# Altium PCB Lower.PcbDoc (part 2 of 2)
Units mil, origin at the board's own origin, x right, y up, seen from the top; angles counter-clockwise.
Board outline 3366.33 x 5314.96 mil, 2 copper layers (Top Layer, Bottom Layer); 108 components, 117 nets, 408 pads, 111 vias.
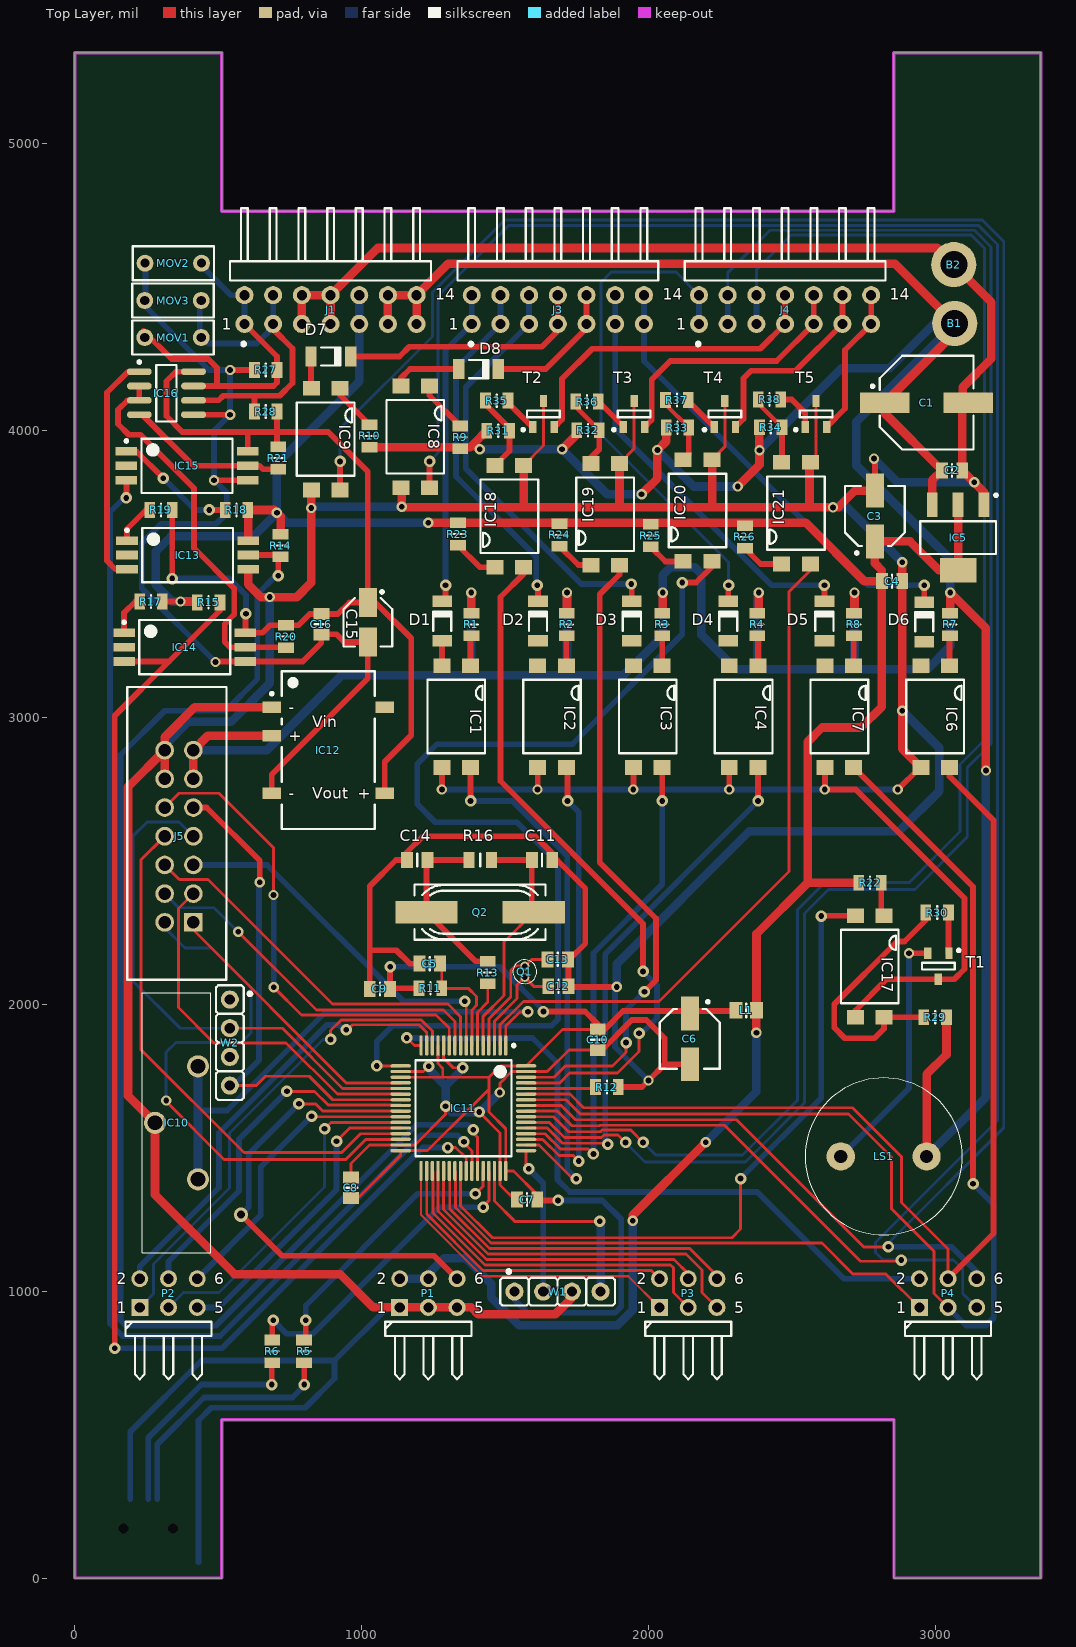
[diagram p0: Top Layer view]

## Via types
v1: diameter 40, hole 20, Top Layer to Bottom Layer, tented both sides, 64 vias
v2: diameter 36, hole 20, Top Layer to Bottom Layer, tented both sides, 46 vias
v3: diameter 50, hole 28, Top Layer to Bottom Layer, tented both sides, 1 vias

## Nets (pads, with @x,y where several pads share a name; then routed paths per layer and width w, separated by ;. In a path a pad name is that pad's centre, name@x,y a point inside that pad or via, vN(x,y) a via of type N, cw(c..) or ccw(c..) an arc to the next point about the centre after c; other vN are vias at no path point) (continued)
NetIC15_5: (continued)
  Top Layer w20: IC16.4@235,4054 413,3876 IC15.5 643,3876 655.37,3863.63 R21.1
NetIC17_1: IC17.1 R22.1 | length 118.8
  Top Layer w10: IC17.1@2810.37,2317.8 IC17.1
  Top Layer w20: IC17.1@2810.37,2317.8 R22.1
NetIC17_4: IC17.4 R29.1 R30.2 | length 930.4
  Top Layer w10: R29.1@2958.46,1953.83 R29.1 ; R30.2@2965.63,2292.63 R30.2
  Top Layer w20: R29.1@2958.46,1953.83 IC17.4 2820,1914 2787,1881 2683,1881 2646,1918 2646,1999.37 2864.63,2218 2891,2218 R30.2@2965.63,2292.63
NetIC18_1: IC18.1 R23.1 | length 160.4
  Top Layer w20: R23.1 1410.8,3522.83 IC18.1
NetIC18_4: IC18.4 R31.1 R35.2 | length 281.4
  Top Layer w10: R35.2@1430.63,4090.37 R35.2
  Top Layer w20: R35.2@1430.63,4090.37 1514.37,4006.63 R31.1 1514.37,3927.54 IC18.4
NetIC19_1: IC19.1 R24.1 | length 136.3
  Top Layer w20: R24.1 1754.8,3529.83 IC19.1
NetIC19_4: IC19.4 R32.1 R36.2 | length 261.9
  Top Layer w10: R36.2@1745.63,4081.74 R36.2 ; IC19.4 IC19.4@1798,3904
  Top Layer w15: R36.2@1745.63,4081.74 R32.1
  Top Layer w20: IC19.4@1798,3904 1827.37,3933.37 R32.1
NetIC20_1: IC20.1 R25.1 | length 134
  Top Layer w20: R25.1 2057.8,3542.83 IC20.1
NetIC20_4: IC20.4 R33.1 R37.2 | length 249.3
  Top Layer w10: IC20.4 IC20.4@2139.37,3916.54
  Top Layer w15: R37.2@2058.63,4089.74 R33.1
  Top Layer w20: R37.2@2058.63,4089.74 R37.2 ; IC20.4@2139.37,3916.54 R33.1
NetIC21_1: IC21.1 R26.1 | length 150.7
  Top Layer w20: R26.1 2389.8,3533.83 IC21.1
NetIC21_4: IC21.4 R34.1 R38.2 | length 253.7
  Top Layer w8: IC21.4 IC21.4@2464.37,3889.54
  Top Layer w15: R38.2@2381.63,4092.74 R34.1
  Top Layer w20: R38.2@2381.63,4092.74 R38.2 ; IC21.4@2464.37,3889.54 R34.1
NetJ2_2: J2.2 R5.2 | length 864
  Top Layer w20: v1(799,674) R5.2
  Bottom Layer w20: J2.2 287.4,466.4 450,629 758,629 v1@799,670
NetJ2_3: J2.3 R6.2 | length 803.1
  Top Layer w10: R6.2@686,753.63 R6.2@688,755.63
  Top Layer w20: v1(686,674) R6.2@686,753.63
  Bottom Layer w20: J2.3 255.91,488.91 441,674 v1(686,674)
NetLS1_2: LS1.2 T1.2 | length 871.3
  Top Layer w20: v2(2907,2177) 2971.32,2177 T1.2
  Bottom Layer w20: LS1.2 2907,1707 v2(2907,2177)
NetR30_1: R30.1 T1.1 | length 142.6
  Top Layer w10: T1.1@3044.37,2179.31 T1.1
  Top Layer w20: T1.1@3044.37,2179.31 R30.1
NetR35_1: R35.1 T2.1 | length 129
  Top Layer w10: R35.1@1509.37,4095.95 R35.1
  Top Layer w20: R35.1@1509.37,4095.95 T2.1@1595.6,4009.72
NetR36_1: R36.1 T3.1 | length 124.4
  Top Layer w10: T3.1 T3.1@1911.6,4012.77
  Top Layer w20: R36.1 T3.1@1911.6,4012.77
NetR37_1: R37.1 T4.1 | length 130.6
  Top Layer w10: R37.1@2137.37,4101.95 R37.1
  Top Layer w20: R37.1@2137.37,4101.95 T4.1
NetR38_1: R38.1 T5.1 | length 152.6
  Top Layer w20: R38.1 2498,4107 2545.6,4059.4 T5.1
NetR39_1: 
OSC1: C11.2 IC11.5 Q2.2 R16.1 | length 862.8
  Top Layer w10: IC11.5 1422.9,1957.9 1495,2030 1495,2216.32 Q2.2 Q2.2@1592.57,2326.77
  Top Layer w20: R16.1 C11.2 Q2.2@1592.57,2326.77
OSC2: C14.1 Q2.1 R13.1 R16.2 | length 613.9
  Top Layer w10: C14.1@1224.99,2499.88 C14.1@1228.43,2503.33
  Top Layer w20: C14.1@1224.99,2499.88 Q2.1 1395.95,2149.37 R13.1 ; C14.1 R16.2
OSC32_1: C12.2 IC11.3 Q1.2 | length 376.1
  Top Layer w10: IC11.3 1462.27,1940.27 1541,2019 1541,2066.32 Q1.2 1599.32,2062 C12.2
OSC32_2: C13.1 IC11.4 Q1.1 | length 437.9
  Top Layer w10: IC11.4 1442.58,1948.58 1519,2025 1519,2117 1534.69,2132.69 Q1.1 1591.31,2156 C13.1
Relay_Fault1: J4.11 J4.12 T4.2 | length 704.2
  Top Layer w20: T4.2 2330,4039.32 2330,4181 2356,4207 2511.53,4207 J4.11 J4.12
Relay_Fault2: J4.13 J4.14 T5.2 | length 522.8
  Top Layer w20: T5.2 2684,4075.32 2684,4279.47 J4.13 J4.14
Relay_S1: J4.7 J4.8 T2.2 | length 1137
  Top Layer w20: T2.2@1670.4,4009.72 1698,4037.32 1698,4179 1803,4284 2388.53,4284 J4.7 J4.8
Relay_S2: J4.9 J4.10 T3.2 | length 919.6
  Top Layer w20: T3.2 2010,4035.32 2010,4176 2075,4241 2445.53,4241 J4.9 J4.10
Relayfault1: IC11.17 IC20.2 | length 3527.8
  Top Layer w10: v1(1052.36,1784.64) IC11.17
  Top Layer w20: v1(2117,3469) 2165,3469 2220,3524 IC20.2
  Bottom Layer w20: v1(1052.36,1784.64) 1052.36,1869.36 1108,1925 1662,1925 1684,1947 1684,2491 1541,2634 1256,2634 1193,2697 1193,2837 1262,2906 1734,2906 2117,3289 v1(2117,3469)
Relayfault2: IC11.2 IC21.2 | length 2403.2
  Top Layer w10: IC11.2 1481.95,1927.99 1543.96,1990 1544.04,1990 1563.04,2009 2036,2009 2489,2462 2489,3437 2563,3511 IC21.2
Reset: C5.2 IC11.7 R11.1 | length 399.4
  Top Layer w10: C5.2 1278.37,2135.06 R11.1 1371,2055 1400,2026 1400,1996 1383.53,1979.53 IC11.7
RS485_A: IC16.7 J1.1 J1.2 MOV1.1 MOV2.2 R27.1 | length 1218.9
  Top Layer w20: MOV1.1@239.57,4346 337.57,4248 465,4248 495,4218 495,4154 ; IC16.7 495,4154 ; J1.1 704.37,4257.1 R27.1 704.37,4166.37 692,4154 495,4154
  Bottom Layer w20: MOV2.2@436.43,4578.57 544.53,4470.47 J1.2 J1.1
RS485_B: IC16.6 J1.3 J1.4 MOV1.2 MOV3.2 R28.2 | length 1181.6
  Top Layer w10: J1.3@691,4352 J1.3
  Top Layer w20: IC16.6 501,4104 517,4120 625,4120 ; R28.2 625.63,4119.37 625,4120 ; J1.3@691,4352 758,4285 758,4164 714,4120 625,4120
  Bottom Layer w20: MOV3.2@435.43,4452 435.43,4347 436.43,4346 436.43,4331.57 466,4302 634,4302 691,4359 J1.3 J1.4
RS485_direct: IC11.41 IC14.3 R15.1 | length 4481.5
  Top Layer w10: v1(1299,1500) 1327,1500 1363.84,1463.16 IC11.41
  Top Layer w20: v1(139,801) 139,3005 328,3194 ; IC14.3 328,3194 ; R15.1 505.37,3371.37 328,3194
  Bottom Layer w20: v1(139,801) 513,801 1212,1500 v1(1299,1500)
RS485_Rx: IC11.43 IC13.5 R14.1 | length 4820.9
  Top Layer w10: R14.1@709,3550.63 R14.1 R14.1@710.63,3565 ; v1(1388,1562) 1388,1551 1403.21,1535.79 IC11.43
  Top Layer w20: IC13.5 R14.1@710.63,3565 ; v1(709,3493) R14.1@709,3550.63
  Bottom Layer w10: v1@700,3493 v1(709,3493)
  Bottom Layer w20: v1@700,3493 636,3429 636,3133 525.5,3022.5 313.5,3022.5 159,2868 159,898 178,879 491,879 1192,1580 1370,1580 v1(1388,1562)
RS485_Tx: IC11.42 IC15.3 | length 4626.9
  Top Layer w10: v1(179,3764) v1@179.58,3764.58 ; v1@1357,1515 1383.53,1488.47 IC11.42
  Top Layer w20: v1@179.58,3764.58 IC15.3
  Bottom Layer w10: v1@171,3764 v1(179,3764)
  Bottom Layer w20: v1@171,3764 122,3715 122,895 122,886.66 165.66,843 506,843 1206,1543 1333,1543 v1(1356,1520)
S1_Select: IC11.61 IC18.2 | length 2417.8
  Top Layer w10: IC11.61 1689.58,1725.58 1724,1760 1891.04,1760 1966,1834.96 v1(1966,1898)
  Top Layer w20: IC18.2 1564,3500 1483,3419 1483,2777 1980,2280 v1(1980,2114)
  Bottom Layer w10: v1(1966,1898) v1@1975,1898
  Bottom Layer w20: v1@1975,1898 2029,1952 2029,2065 v1(1980,2114)
S2_Select: IC11.62 IC19.2 | length 2235.7
  Top Layer w10: IC11.62 1670.27,1745.27 1709,1784 1874,1784 1921,1831 v1(1921,1866)
  Top Layer w20: IC19.2 1898,3497 1829,3428 1829,2494 2025,2298 2025,2083 v1(1985,2043)
  Bottom Layer w20: v1(1921,1866) 1921,1979 v1(1985,2043)
SPI1_CS1: IC11.20 J5.1 | length 970
  Top Layer w10: J5.1 413,2258 945.42,1725.58 IC11.20
SPI1_MISO: IC11.22 J5.3 | length 1318
  Top Layer w10: J5.3 361,2333 361,1988 484,1865 736,1865 914.79,1686.21 IC11.22
SPI1_MOSI: IC11.23 J5.9 W2.4 | length 1785.2
  Top Layer w10: W2.4 632,1716 664.5,1748.5 816.5,1748.5 898.47,1666.53 IC11.23
  Top Layer w20: J5.9 459,2685 644,2500 v2(644,2425)
  Bottom Layer w10: W2.4 W2.4@553,1716 ; v2@641.5,2422.5 v2(644,2425)
  Bottom Layer w20: W2.4@553,1716 641.5,1804.5 v2@641.5,2422.5
SPI1_SCK: IC11.21 J5.7 W2.2 | length 1845.3
  Top Layer w10: W2.2 723,1916 933.1,1705.9 IC11.21
  Bottom Layer w10: J5.7 363,2635 252,2635 202,2585 202,2081 367,1916 W2.2
SPI2_CLK: IC11.29 J5.8 | length 1857.8
  Top Layer w10: J5.8 231,2503 231,1841 589,1483 930,1483 995.42,1548.42 IC11.29
SPI2_CS: IC11.30 J5.2 | length 1993
  Top Layer w10: v2(318,1664) 315,1664 520,1459 944,1459 1013.73,1528.73 IC11.30
  Bottom Layer w10: J5.2 313,2266 384,2195 476,2195 614,2057 614,1900 580,1866 352,1866 318,1832 v2(318,1664)
SPI2_MISO: IC11.10 J5.4 | length 1280
  Top Layer w10: v2(569,2252) 842,1979 1285,1979 1324.47,1939.53 IC11.10
  Bottom Layer w10: J5.4 362,2336 485,2336 v2(569,2252)
SPI2_MOSI: IC11.11 J5.10 | length 1696.5
  Top Layer w10: J5.10 363,2735 502,2735 692,2545 v2(692,2380) ; v2(693,2059) 790,1962 1259,1962 1304.79,1916.21 IC11.11
  Bottom Layer w10: v2(692,2380) v2@693,2379
  Bottom Layer w20: v2(693,2059) v2@693,2379
SWCLK: IC11.49 W1.2 | length 516
  Top Layer w10: IC11.49 1572.5,1435.5 v1(1582,1426)
  Bottom Layer w20: v1(1582,1426) 1632,1376 W1.2
SWDIO: IC11.46 W1.4 | length 747
  Top Layer w10: IC11.46 1462.27,1313.73 1533,1243 v1(1829,1243)
  Bottom Layer w30: v1(1829,1243) 1832,1240 W1.4
UP_btn: D8.1 J3.9 J3.10 | length 481.4
  Top Layer w10: J3.9@1783,4355 J3.9
  Top Layer w20: D8.1 1641,4213 J3.9@1783,4355 ; J3.9 J3.10
USB_DM: IC11.44 R5.1 | length 965.9
  Top Layer w10: R5.1 R5.1@805,835.37 ; v1(1396,1339) 1422.9,1365.9 IC11.44
  Top Layer w20: R5.1@805,835.37 v1(805,898)
  Bottom Layer w20: v1(805,898) 805,950 1194,1339 v1(1396,1339)
USB_DP: IC11.45 R6.1 | length 1138.6
  Top Layer w10: v1@688,895 v1(691,898) ; v1(1423,1292) 1423,1295 1442.58,1314.58 IC11.45
  Top Layer w20: R6.1 v1@688,895
  Bottom Layer w20: v1(691,898) 738,851 830,851 1271,1292 v1(1423,1292)
VCC485: C15.1 C16.1 IC12.8 IC14.6 IC15.6 IC16.8 R19.2 R20.2 R21.2 R28.1 | length 3566.7
  Top Layer w10: v1@338,3483 v1(339.37,3483) ; v1@594.42,3358.42 v1(596,3360) ; 602.42,3990.42 606,3994 ; R21.2@704.37,3947 R21.2 ; C15.1 C15.1@1034,3399.9
  Top Layer w20: v1(339.37,3483) R19.2 ; IC16.8 352,4204 319,4171 319,4049 374,3994 606,3994 703,3994 ; v1@594.42,3358.42 IC14.6 654,3294 680.37,3320.37 R20.2 779.37,3320.37 818.43,3359.43 C16.1 916.43,3359.43 956.9,3399.9 C15.1 1021,3856 883,3994 704.37,3994 ; IC15.6 602.42,3990.42 ; R21.2@704.37,3947 704.37,3994 ; R28.1 704.37,3994 ; C15.1@1034,3399.9 1047.1,3399.9 1172,3275 1172,2937 1079.85,2844.85 IC12.8
  Bottom Layer w10: v1@338,3482 339,3483 v1(339.37,3483)
  Bottom Layer w20: v1(339.37,3483) 538,3483 596,3425 v1(596,3360)
pads on no net: D2.2 D3.2 D4.2 D5.2 D6.2 IC2.2 IC3.2 IC4.2 IC6.2 IC7.2 IC12.14 IC13.2 IC14.2 IC15.2 J2.1 J2.4 J2.6@80.71,54.53 J2.6@80.71,271.06 J2.MTG1 J2.MTG2 W2.1 W2.3

## Keep-outs
Keep-Out Layer:
  the board outline again, w12.01

## Silkscreen, mask and mechanical layers (free items; w line width, h text height)
Top Overlay:
  lines w8: 405,2085 528,2085 528,2285 528.35,2285
Mechanical 1:
  lines w25: 912,1522 912,1523

## Dimensions
0,5314.96 to 100,5280 on Mechanical 1
3366.33,0 to 3143,943 on Mechanical 1
3366.33,5314.96 to 3265,5295 on Mechanical 1

## Text inside footprints (layer, text, board x,y; h text height)
IC12: Top Overlay "+" at 984.97,2715.31 h40; Top Overlay "-" at 745.2,2715.31 h40; Top Overlay "+" at 745.2,2915.32 h40; Top Overlay "-" at 745.2,3015.32 h40; Top Overlay "Vout" at 826.45,2715.31 h40; Top Overlay "Vin" at 826.45,2965.32 h40; Mechanical 14 "Vin" at 826.45,2965.32 h39.37; Mechanical 14 "Vout" at 826.45,2715.31 h39.37; Mechanical 14 "-" at 745.2,3015.32 h39.37; Mechanical 14 "+" at 745.2,2915.32 h39.37; Mechanical 14 "-" at 745.2,2715.31 h39.37; Mechanical 14 "+" at 984.97,2715.31 h39.37
J1: Top Overlay "1" at 511,4350.47 h40; Top Overlay "14" at 1256,4455.47 h40; Mechanical 14 "1" at 511,4350.47 h40; Mechanical 14 "14" at 1256,4455.47 h40
J3: Top Overlay "1" at 1303,4350.47 h40; Top Overlay "14" at 2048,4455.47 h40; Mechanical 14 "1" at 1303,4350.47 h40; Mechanical 14 "14" at 2048,4455.47 h40
J4: Top Overlay "1" at 2095,4350.47 h40; Top Overlay "14" at 2840,4455.47 h40; Mechanical 14 "1" at 2095,4350.47 h40; Mechanical 14 "14" at 2840,4455.47 h40
P1: Top Overlay "2" at 1051.92,1023 h40; Top Overlay "1" at 1051.92,923 h40; Top Overlay "5" at 1391.92,923 h40; Top Overlay "6" at 1391.92,1023 h40
P2: Top Overlay "2" at 146.38,1023 h40; Top Overlay "1" at 146.38,923 h40; Top Overlay "5" at 486.38,923 h40; Top Overlay "6" at 486.38,1023 h40
P3: Top Overlay "2" at 1957.46,1023 h40; Top Overlay "1" at 1957.46,923 h40; Top Overlay "5" at 2297.46,923 h40; Top Overlay "6" at 2297.46,1023 h40
P4: Top Overlay "2" at 2863,1023 h40; Top Overlay "1" at 2863,923 h40; Top Overlay "5" at 3203,923 h40; Top Overlay "6" at 3203,1023 h40